# EAGLE board CT_schematic (EAGLE 7.6.0)

Size 100 x 80 mm. Coordinates in mm from the lower left corner, seen from the top.
Outline: 0,0 100,0 100,80 0,80 0,0
Copper layers (1*16): Top 0.035mm / dielectric 1.5mm / Bottom 0.035mm
Design rules "default": minimum track width 10mil, minimum drill 24mil, track to track 8mil, track to pad 8mil, pad to pad 8mil, via to via 8mil, smd to smd 8mil, copper to edge 40mil, drill to drill 8mil, minimum pad ring 10mil, minimum via ring 8mil, stop-mask expansion 4mil, vias tented up to drill 0mil, thermal gap 10mil

## Footprints (pad centres in the part's own frame; a part is rotated, then mirrored left to right if it is on the bottom)
C0603 = smd 0.8 x 0.8: 1 -0.762,0; 2 0.762,0
C0402 = smd 0.5 x 0.5: 1 -0.508,0; 2 0.508,0
C0805 = smd 1.2 x 1.3: 1 -1.016,0; 2 1.016,0
C1210 = smd 1.2 x 2.5: 1 -1.524,0; 2 1.524,0
2220 = smd 1.85 x 5.5: 1 -2.55,0; 2 2.55,0
EXV-9H = smd 3.505 x 1.676: 1 -2.857,0; 2 2.857,0
L0603 = smd 0.8 x 0.8: 1 -0.762,0; 2 0.762,0
DR1040 = smd 1.6 x 3.2: 1 -4.458,0; 2 4.458,0
IND_PM3316 = smd 2.921 x 2.794: 1 -5.144,0; 2 5.144,0
L1210 = smd 1.2 x 2.5: 1 -1.524,0; 2 1.524,0
PJ-037B_PACKAGE = drill 3.7 square: 1 12,0 | drill 3.2 square: 2 6,0
R0603 = smd 0.8 x 0.8: 1 -0.762,0; 2 0.762,0
LQFP208 = smd 0.3 x 1.2: 1 -12.75,-14.4; 2 -12.25,-14.4; 3 -11.75,-14.4; 4 -11.25,-14.4; 5 -10.75,-14.4; 6 -10.25,-14.4; 7 -9.75,-14.4; 8 -9.25,-14.4; 9 -8.75,-14.4; 10 -8.25,-14.4; 11 -7.75,-14.4; 12 -7.25,-14.4; 13 -6.75,-14.4; 14 -6.25,-14.4; 15 -5.75,-14.4; 16 -5.25,-14.4; 17 -4.75,-14.4; 18 -4.25,-14.4; 19 -3.75,-14.4; 20 -3.25,-14.4; 21 -2.75,-14.4; 22 -2.25,-14.4; 23 -1.75,-14.4; 24 -1.25,-14.4; 25 -0.75,-14.4; 26 -0.25,-14.4; 27 0.25,-14.4; 28 0.75,-14.4; 29 1.25,-14.4; 30 1.75,-14.4; 31 2.25,-14.4; 32 2.75,-14.4; 33 3.25,-14.4; 34 3.75,-14.4; 35 4.25,-14.4; 36 4.75,-14.4; 37 5.25,-14.4; 38 5.75,-14.4; 39 6.25,-14.4; 40 6.75,-14.4; 41 7.25,-14.4; 42 7.75,-14.4; 43 8.25,-14.4; 44 8.75,-14.4; 45 9.25,-14.4; 46 9.75,-14.4; 47 10.25,-14.4; 48 10.75,-14.4; 49 11.25,-14.4; 50 11.75,-14.4; 51 12.25,-14.4; 52 12.75,-14.4; 105 12.75,14.4; 106 12.25,14.4; 107 11.75,14.4; 108 11.25,14.4; 109 10.75,14.4; 110 10.25,14.4; 111 9.75,14.4; 112 9.25,14.4; 113 8.75,14.4; 114 8.25,14.4; 115 7.75,14.4; 116 7.25,14.4; 117 6.75,14.4; 118 6.25,14.4; 119 5.75,14.4; 120 5.25,14.4; 121 4.75,14.4; 122 4.25,14.4; 123 3.75,14.4; 124 3.25,14.4; 125 2.75,14.4; 126 2.25,14.4; 127 1.75,14.4; 128 1.25,14.4; 129 0.75,14.4; 130 0.25,14.4; 131 -0.25,14.4; 132 -0.75,14.4; 133 -1.25,14.4; 134 -1.75,14.4; 135 -2.25,14.4; 136 -2.75,14.4; 137 -3.25,14.4; 138 -3.75,14.4; 139 -4.25,14.4; 140 -4.75,14.4; 141 -5.25,14.4; 142 -5.75,14.4; 143 -6.25,14.4; 144 -6.75,14.4; 145 -7.25,14.4; 146 -7.75,14.4; 147 -8.25,14.4; 148 -8.75,14.4; 149 -9.25,14.4; 150 -9.75,14.4; 151 -10.25,14.4; 152 -10.75,14.4; 153 -11.25,14.4; 154 -11.75,14.4; 155 -12.25,14.4; 156 -12.75,14.4 | smd 1.2 x 0.3: 53 14.4,-12.75; 54 14.4,-12.25; 55 14.4,-11.75; 56 14.4,-11.25; 57 14.4,-10.75; 58 14.4,-10.25; 59 14.4,-9.75; 60 14.4,-9.25; 61 14.4,-8.75; 62 14.4,-8.25; 63 14.4,-7.75; 64 14.4,-7.25; 65 14.4,-6.75; 66 14.4,-6.25; 67 14.4,-5.75; 68 14.4,-5.25; 69 14.4,-4.75; 70 14.4,-4.25; 71 14.4,-3.75; 72 14.4,-3.25; 73 14.4,-2.75; 74 14.4,-2.25; 75 14.4,-1.75; 76 14.4,-1.25; 77 14.4,-0.75; 78 14.4,-0.25; 79 14.4,0.25; 80 14.4,0.75; 81 14.4,1.25; 82 14.4,1.75; 83 14.4,2.25; 84 14.4,2.75; 85 14.4,3.25; 86 14.4,3.75; 87 14.4,4.25; 88 14.4,4.75; 89 14.4,5.25; 90 14.4,5.75; 91 14.4,6.25; 92 14.4,6.75; 93 14.4,7.25; 94 14.4,7.75; 95 14.4,8.25; 96 14.4,8.75; 97 14.4,9.25; 98 14.4,9.75; 99 14.4,10.25; 100 14.4,10.75; 101 14.4,11.25; 102 14.4,11.75; 103 14.4,12.25; 104 14.4,12.75; 157 -14.4,12.75; 158 -14.4,12.25; 159 -14.4,11.75; 160 -14.4,11.25; 161 -14.4,10.75; 162 -14.4,10.25; 163 -14.4,9.75; 164 -14.4,9.25; 165 -14.4,8.75; 166 -14.4,8.25; 167 -14.4,7.75; 168 -14.4,7.25; 169 -14.4,6.75; 170 -14.4,6.25; 171 -14.4,5.75; 172 -14.4,5.25; 173 -14.4,4.75; 174 -14.4,4.25; 175 -14.4,3.75; 176 -14.4,3.25; 177 -14.4,2.75; 178 -14.4,2.25; 179 -14.4,1.75; 180 -14.4,1.25; 181 -14.4,0.75; 182 -14.4,0.25; 183 -14.4,-0.25; 184 -14.4,-0.75; 185 -14.4,-1.25; 186 -14.4,-1.75; 187 -14.4,-2.25; 188 -14.4,-2.75; 189 -14.4,-3.25; 190 -14.4,-3.75; 191 -14.4,-4.25; 192 -14.4,-4.75; 193 -14.4,-5.25; 194 -14.4,-5.75; 195 -14.4,-6.25; 196 -14.4,-6.75; 197 -14.4,-7.25; 198 -14.4,-7.75; 199 -14.4,-8.25; 200 -14.4,-8.75; 201 -14.4,-9.25; 202 -14.4,-9.75; 203 -14.4,-10.25; 204 -14.4,-10.75; 205 -14.4,-11.25; 206 -14.4,-11.75; 207 -14.4,-12.25; 208 -14.4,-12.75
TQFP64_10X10MC = smd 1.473 x 0.279: 1 -5.613,3.75; 2 -5.613,3.25; 3 -5.613,2.75; 4 -5.613,2.25; 5 -5.613,1.75; 6 -5.613,1.25; 7 -5.613,0.75; 8 -5.613,0.25; 9 -5.613,-0.25; 10 -5.613,-0.75; 11 -5.613,-1.25; 12 -5.613,-1.75; 13 -5.613,-2.25; 14 -5.613,-2.75; 15 -5.613,-3.25; 16 -5.613,-3.75; 33 5.613,-3.75; 34 5.613,-3.25; 35 5.613,-2.75; 36 5.613,-2.25; 37 5.613,-1.75; 38 5.613,-1.25; 39 5.613,-0.75; 40 5.613,-0.25; 41 5.613,0.25; 42 5.613,0.75; 43 5.613,1.25; 44 5.613,1.75; 45 5.613,2.25; 46 5.613,2.75; 47 5.613,3.25; 48 5.613,3.75 | smd 0.279 x 1.473: 17 -3.75,-5.613; 18 -3.25,-5.613; 19 -2.75,-5.613; 20 -2.25,-5.613; 21 -1.75,-5.613; 22 -1.25,-5.613; 23 -0.75,-5.613; 24 -0.25,-5.613; 25 0.25,-5.613; 26 0.75,-5.613; 27 1.25,-5.613; 28 1.75,-5.613; 29 2.25,-5.613; 30 2.75,-5.613; 31 3.25,-5.613; 32 3.75,-5.613; 49 3.75,5.613; 50 3.25,5.613; 51 2.75,5.613; 52 2.25,5.613; 53 1.75,5.613; 54 1.25,5.613; 55 0.75,5.613; 56 0.25,5.613; 57 -0.25,5.613; 58 -0.75,5.613; 59 -1.25,5.613; 60 -1.75,5.613; 61 -2.25,5.613; 62 -2.75,5.613; 63 -3.25,5.613; 64 -3.75,5.613
7498011122R = smd 0.71 x 2.29: 1 -3.545,-3.18; 2 -2.525,-3.18; 3 -1.505,-3.18; 4 -0.485,-3.18; 5 0.535,-3.18; 6 1.555,-3.18; 8 3.595,-3.18; 9 5.635,-3.18; 10 6.655,-3.18; 11 -6.605,-3.18; 12 -5.585,-3.18 | smd 1.4 x 2.54: 13 -8.51,10.2; 14 8.51,10.2 | hole 1.4: -3.5,0; 3.5,0
SSOP-28 = smd 1.5 x 0.4: 1 -3.625,4.225; 2 -3.625,3.575; 3 -3.625,2.925; 4 -3.625,2.275; 5 -3.625,1.625; 6 -3.625,0.975; 7 -3.625,0.325; 8 -3.625,-0.325; 9 -3.625,-0.975; 10 -3.625,-1.625; 11 -3.625,-2.275; 12 -3.625,-2.925; 13 -3.625,-3.575; 14 -3.625,-4.225; 15 3.625,-4.225; 16 3.625,-3.575; 17 3.625,-2.925; 18 3.625,-2.275; 19 3.625,-1.625; 20 3.625,-0.975; 21 3.625,-0.325; 22 3.625,0.325; 23 3.625,0.975; 24 3.625,1.625; 25 3.625,2.275; 26 3.625,2.925; 27 3.625,3.575; 28 3.625,4.225
FCI_10118193-0001LF = smd 0.4 x 1.35: 1 -1.3,2.675; 2 -0.65,2.675; 3 0,2.675; 4 0.65,2.675; 5 1.3,2.675 | smd 1.6 x 1.4: 6 -3.2,2.45; 7 3.2,2.45 | smd 1.9 x 1.9: 8 -1.2,0; 9 1.2,0 | hole 0.5: -3.3,0; 3.3,0
LH430WV2-SD01 = smd 0.23 x 0.7: 1 0,0; 2 -0.4,0; 3 -0.8,0; 4 -1.2,0; 5 -1.6,0; 6 -2,0; 7 -2.4,0; 8 -2.8,0; 9 -3.2,0; 10 -3.6,0; 11 -4,0; 12 -4.4,0; 13 -4.8,0; 14 -5.2,0; 15 -5.6,0; 16 -5.6,-2.15; 17 -5.2,-2.15; 18 -4.8,-2.15; 19 -4.4,-2.15; 20 -4,-2.15; 21 -3.6,-2.15; 22 -3.2,-2.15; 23 -2.8,-2.15; 24 -2.4,-2.15; 25 -2,-2.15; 26 -1.6,-2.15; 27 -1.2,-2.15; 28 -0.8,-2.15; 29 -0.4,-2.15; 30 0,-2.15
TDFN-8/6MM = smd 0.3 x 0.75: 1 0,0; 2 0.5,0; 3 1,0; 4 1.5,0; 5 1.5,3; 6 1,3; 7 0.5,3; 8 0,3
QFN-32 = smd 0.6 x 0.3: 1 -2.3,1.75; 2 -2.3,1.25; 3 -2.3,0.75; 4 -2.3,0.25; 5 -2.3,-0.25; 6 -2.3,-0.75; 7 -2.3,-1.25; 8 -2.3,-1.75; 17 2.3,-1.75; 18 2.3,-1.25; 19 2.3,-0.75; 20 2.3,-0.25; 21 2.3,0.25; 22 2.3,0.75; 23 2.3,1.25; 24 2.3,1.75 | smd 0.3 x 0.6: 9 -1.75,-2.3; 10 -1.25,-2.3; 11 -0.75,-2.3; 12 -0.25,-2.3; 13 0.25,-2.3; 14 0.75,-2.3; 15 1.25,-2.3; 16 1.75,-2.3; 25 1.75,2.3; 26 1.25,2.3; 27 0.75,2.3; 28 0.25,2.3; 29 -0.25,2.3; 30 -0.75,2.3; 31 -1.25,2.3; 32 -1.75,2.3 | smd 3.2 x 3.2: EXP 0,0
SJ-43515TS-SMT-TR = smd 2.2 x 3: 1 0.6,-7.4; 4 3.4,-7.4 | smd 3 x 3: 2 12.8,-7.4; 5 17,-3 | smd 2 x 3: 3 5.3,0; 6 2.5,0 | drill 1.8: P$7 4.5,-3.69; P$8 11.54,-3.69
WM-64PC = drill 0.6 pad 1: 1 -1,0.95; 2 -1,-0.95
QFN-28 = smd 0.813 x 0.305: 1 -2.451,1.5; 2 -2.451,1; 3 -2.451,0.5; 4 -2.451,0; 5 -2.451,-0.5; 6 -2.451,-1; 7 -2.451,-1.5; 15 2.451,-1.5; 16 2.451,-1; 17 2.451,-0.5; 18 2.451,0; 19 2.451,0.5; 20 2.451,1; 21 2.451,1.5 | smd 0.305 x 0.813: 8 -1.5,-2.451; 9 -1,-2.451; 10 -0.5,-2.451; 11 0,-2.451; 12 0.5,-2.451; 13 1,-2.451; 14 1.5,-2.451; 22 1.5,2.451; 23 1,2.451; 24 0.5,2.451; 25 0,2.451; 26 -0.5,2.451; 27 -1,2.451; 28 -1.5,2.451 | smd 3.607 x 3.607: 29 0,0
ABS07-32.768KHZ-7-T = smd 1.1 x 2.4: 1 -2.5,0; 2 0,0
ABLS-25.000MHZ-B2F-T = smd 5.6 x 2.8: 1 -3.81,0; 2 5.69,0
ABLS-12.000MHZ-B4-T = smd 5.6 x 2.8: 1 0,0; 2 9.5,0
ABLS-12.288MHZ-B4-T = smd 5.6 x 2.8: 1 -3.81,0; 2 5.69,0
ASFL1 = smd 1.7 x 1.5: 1 -1.27,-1.1; 2 1.27,-1.1; 3 1.27,1.1; 4 -1.27,1.1
SOIC-8_EP = smd 1.6 x 0.533: 1 -2.921,1.905; 2 -2.921,0.635; 3 -2.921,-0.635; 4 -2.921,-1.905; 5 2.921,-1.905; 6 2.921,-0.635; 7 2.921,0.635; 8 2.921,1.905 | smd 2.54 x 3.302: EPAD 0,0 | drill 0.406 pad 0.406: P$1 -0.508,0.635; P$2 0.381,0.635; P$3 -0.508,-0.635; P$4 0.381,-0.635
TSOT-23-5 = smd 1.3 x 0.62: 1 -1.31,0.95; 2 -1.31,0; 3 -1.31,-0.95; 4 1.31,-0.95; 5 1.31,0.95
QFN-16_EP = smd 0.805 x 0.3: 1 -1.452,0.75; 2 -1.452,0.25; 3 -1.452,-0.25; 4 -1.452,-0.75; 9 1.452,-0.75; 10 1.452,-0.25; 11 1.452,0.25; 12 1.452,0.75 | smd 0.3 x 0.805: 5 -0.75,-1.452; 6 -0.25,-1.452; 7 0.25,-1.452; 8 0.75,-1.452; 13 0.75,1.452; 14 0.25,1.452; 15 -0.25,1.452; 16 -0.75,1.452 | smd 1.55 x 1.55: 17 0,0
DFN-8_DDB = smd 0.805 x 0.3: 1 -0.952,0.75; 2 -0.952,0.25; 3 -0.952,-0.25; 4 -0.952,-0.75; 5 0.952,-0.75; 6 0.952,-0.25; 7 0.952,0.25; 8 0.952,0.75 | smd 0.61 x 2.2: 9 0,0
SON-6 = smd 0.55 x 0.3: 1 -0.355,0.5 | smd 0.52 x 0.3: 2 -0.37,0; 3 -0.37,-0.5; 4 0.37,-0.5; 5 0.37,0; 6 0.37,0.5
SW_4-1437565-2 = smd 1.4 x 2.1: 1 -2.23,4.55; 2 -2.23,-4.55; 3 2.23,4.55; 4 2.23,-4.55
LGM67K-G1J2-24-Z = smd 0.8 x 1.4: A -2,0; C 0,0
NC7SZ125M5X = smd 1.3 x 0.7: 1 -1.3,0.95; 2 -1.3,0; 3 -1.3,-0.95; 4 1.3,-0.95; 5 1.3,0.95

## Placement (x,y rotation side)
C1  1e-06  [C0603]  -105.41,99.06 0 top  (outside the outline)
C2  1e-07  [C0603]  -109.22,99.06 0 top  (outside the outline)
C3  1e-07  [C0603]  -15.24,104.14 0 top  (outside the outline)
C4  1e-07  [C0603]  -19.05,104.14 0 top  (outside the outline)
C5  1e-07  [C0603]  -22.86,104.14 0 top  (outside the outline)
C6  1e-07  [C0603]  -26.67,104.14 0 top  (outside the outline)
C7  1e-07  [C0603]  -30.48,104.14 0 top  (outside the outline)
C8  1e-07  [C0603]  -34.29,104.14 0 top  (outside the outline)
C9  1e-07  [C0603]  -38.1,104.14 0 top  (outside the outline)
C10  1e-07  [C0603]  -41.91,104.14 0 top  (outside the outline)
C11  1e-07  [C0603]  -45.72,104.14 0 top  (outside the outline)
C12  1e-07  [C0603]  -49.53,104.14 0 top  (outside the outline)
C13  1e-07  [C0603]  -53.34,104.14 0 top  (outside the outline)
C14  1e-07  [C0603]  -57.15,104.14 0 top  (outside the outline)
C15  1e-07  [C0603]  -60.96,104.14 0 top  (outside the outline)
C16  1e-07  [C0603]  -64.77,104.14 0 top  (outside the outline)
C17  1e-07  [C0603]  -68.58,104.14 0 top  (outside the outline)
C18  1e-07  [C0603]  -72.39,104.14 0 top  (outside the outline)
C19  1e-07  [C0603]  -76.2,104.14 0 top  (outside the outline)
C20  4.7e-06  [C0603]  -74.93,99.06 0 top  (outside the outline)
C21  2.2e-06  [C0603]  -78.74,99.06 0 top  (outside the outline)
C22  2.2e-06  [C0603]  -82.55,99.06 0 top  (outside the outline)
C23  1e-08  [C0603]  -80.01,104.14 0 top  (outside the outline)
C24  1e-06  [C0603]  -83.82,104.14 0 top  (outside the outline)
C25  1e-07  [C0603]  -87.63,104.14 0 top  (outside the outline)
C26  2.2e-06  [C0603]  -86.36,99.06 0 top  (outside the outline)
C27  1e-11  [C0402]  -46.99,114.3 0 top  (outside the outline)
C28  1e-11  [C0402]  -50.8,114.3 0 top  (outside the outline)
C29  1e-11  [C0402]  -54.61,114.3 0 top  (outside the outline)
C30  1e-11  [C0402]  -58.42,114.3 0 top  (outside the outline)
C31  1.8e-08  [C0402]  -31.75,114.3 0 top  (outside the outline)
C32  2.2e-06  [C0603]  -90.17,99.06 0 top  (outside the outline)
C33  1e-07  [C0402]  -62.23,114.3 0 top  (outside the outline)
C34  1e-08  [C0402]  -66.04,114.3 0 top  (outside the outline)
C35  2.2e-06  [C0603]  -93.98,99.06 0 top  (outside the outline)
C36  1e-07  [C0402]  -69.85,114.3 0 top  (outside the outline)
C37  1e-08  [C0402]  -73.66,114.3 0 top  (outside the outline)
C38  1e-07  [C0402]  -77.47,114.3 0 top  (outside the outline)
C39  1e-07  [C0402]  -81.28,114.3 0 top  (outside the outline)
C40  1e-05  [C0805]  -59.69,87.63 0 top  (outside the outline)
C41  1e-07  [C0402]  -85.09,114.3 0 top  (outside the outline)
C42  1e-07  [C0402]  -88.9,114.3 0 top  (outside the outline)
C43  1e-07  [C0402]  -92.71,114.3 0 top  (outside the outline)
C44  4.7e-06  [C0805]  -64.77,87.63 0 top  (outside the outline)
C45  1e-07  [C0402]  -96.52,114.3 0 top  (outside the outline)
C46  1e-07  [C0402]  -100.33,114.3 0 top  (outside the outline)
C47  1e-07  [C0402]  -104.14,114.3 0 top  (outside the outline)
C48  1e-07  [C0402]  -107.95,114.3 0 top  (outside the outline)
C49  1e-07  [C0402]  -15.24,119.38 0 top  (outside the outline)
C50  1e-07  [C0402]  -19.05,119.38 0 top  (outside the outline)
C51  1e-07  [C0402]  -22.86,119.38 0 top  (outside the outline)
C52  1e-08  [C0402]  -26.67,119.38 0 top  (outside the outline)
C53  1e-06  [C0603]  -91.44,104.14 0 top  (outside the outline)
C54  1e-06  [C0603]  -95.25,104.14 0 top  (outside the outline)
C55  1e-06  [C0603]  -99.06,104.14 0 top  (outside the outline)
C56  1e-06  [C0603]  -102.87,104.14 0 top  (outside the outline)
C57  1e-06  [C0603]  -106.68,104.14 0 top  (outside the outline)
C58  1e-06  [C0603]  -110.49,104.14 0 top  (outside the outline)
C59  1e-06  [C0603]  -15.24,109.22 0 top  (outside the outline)
C60  1e-07  [C0402]  -30.48,119.38 0 top  (outside the outline)
C61  1e-07  [C0402]  -34.29,119.38 0 top  (outside the outline)
C62  1e-07  [C0402]  -38.1,119.38 0 top  (outside the outline)
C63  1e-07  [C0402]  -41.91,119.38 0 top  (outside the outline)
C64  1e-06  [C0603]  -19.05,109.22 0 top  (outside the outline)
C65  2.2e-05  [C1210]  -86.36,81.28 0 top  (outside the outline)
C66  2.2e-05  [C1210]  -92.71,81.28 0 top  (outside the outline)
C67  1e-09  [C0402]  -45.72,119.38 0 top  (outside the outline)
C68  1e-09  [C0402]  -49.53,119.38 0 top  (outside the outline)
C69  1e-07  [C0402]  -53.34,119.38 0 top  (outside the outline)
C70  1e-07  [C0402]  -57.15,119.38 0 top  (outside the outline)
C71  1e-07  [C0402]  -60.96,119.38 0 top  (outside the outline)
C72  1e-07  [C0402]  -64.77,119.38 0 top  (outside the outline)
C73  1e-07  [C0402]  -68.58,119.38 0 top  (outside the outline)
C74  1e-05  [C0805]  -69.85,87.63 0 top  (outside the outline)
C75  1e-05  [C0805]  -74.93,87.63 0 top  (outside the outline)
C76  1e-05  [C0805]  -80.01,87.63 0 top  (outside the outline)
C77  1e-05  [C0805]  -85.09,87.63 0 top  (outside the outline)
C78  1e-05  [C0805]  -90.17,87.63 0 top  (outside the outline)
C79  2.2e-11  [C0402]  -35.56,114.3 0 top  (outside the outline)
C80  2.2e-11  [C0402]  -39.37,114.3 0 top  (outside the outline)
C81  1e-08  [C0402]  -72.39,119.38 0 top  (outside the outline)
C82  1e-05  [C1210]  -99.06,81.28 0 top  (outside the outline)
C83  1e-05  [C1210]  -105.41,81.28 0 top  (outside the outline)
C84  1e-05  [C1210]  -16.51,88.9 0 top  (outside the outline)
C85  1e-05  [C1210]  -22.86,88.9 0 top  (outside the outline)
C86  1e-05  [C0805]  -95.25,87.63 0 top  (outside the outline)
C87  1e-05  [C0805]  -100.33,87.63 0 top  (outside the outline)
C88  1e-05  [C0805]  -105.41,87.63 0 top  (outside the outline)
C89  1e-06  [C0603]  -22.86,109.22 0 top  (outside the outline)
C90  1e-07  [C0402]  -76.2,119.38 0 top  (outside the outline)
C91  6.8e-05  [2220]  -81.28,63.5 0 top  (outside the outline)
C92  1e-05  [C1210]  -29.21,88.9 0 top  (outside the outline)
C93  2.2e-06  [C0603]  -97.79,99.06 0 top  (outside the outline)
C94  2.2e-07  [C0603]  -101.6,99.06 0 top  (outside the outline)
C95  1e-07  [C0402]  -80.01,119.38 0 top  (outside the outline)
C96  0.0001  [EXV-9H]  -29.21,73.66 0 top  (outside the outline)
C97  0.0001  [EXV-9H]  -40.64,73.66 0 top  (outside the outline)
C98  1e-08  [C0402]  -83.82,119.38 0 top  (outside the outline)
C99  1e-08  [C0402]  -87.63,119.38 0 top  (outside the outline)
C100  1e-08  [C0402]  -43.18,114.3 0 top  (outside the outline)
F1  240.0  [L0603]  -26.67,109.22 0 top  (outside the outline)
F2  510.0  [L0603]  -30.48,109.22 0 top  (outside the outline)
I1  7e-06  [DR1040]  -19.05,63.5 0 top  (outside the outline)
I2  1.5e-06  [IND_PM3316]  -41.91,63.5 0 top  (outside the outline)
I3  1e-05  [L1210]  -35.56,88.9 0 top  (outside the outline)
J1  PJ-037B  [PJ-037B_PACKAGE]  -83.82,50.8 0 top  (outside the outline)
R2  1000.0  [R0603]  -34.29,109.22 0 top  (outside the outline)
R4  4700.0  [R0603]  -38.1,109.22 0 top  (outside the outline)
R5  4700.0  [R0603]  -41.91,109.22 0 top  (outside the outline)
R6  4700.0  [R0603]  -45.72,109.22 0 top  (outside the outline)
R7  2200.0  [R0603]  -49.53,109.22 0 top  (outside the outline)
R8  2200.0  [R0603]  -53.34,109.22 0 top  (outside the outline)
R9  2200.0  [R0603]  -57.15,109.22 0 top  (outside the outline)
R10  2200.0  [R0603]  -60.96,109.22 0 top  (outside the outline)
R11  2200.0  [R0603]  -64.77,109.22 0 top  (outside the outline)
R12  10000.0  [R0603]  -58.42,93.98 0 top  (outside the outline)
R13  10000.0  [R0603]  -63.5,93.98 0 top  (outside the outline)
R14  10000.0  [R0603]  -68.58,93.98 0 top  (outside the outline)
R15  0.1  [R0603]  -68.58,109.22 0 top  (outside the outline)
R16  0.1  [R0603]  -72.39,109.22 0 top  (outside the outline)
R17  200.0  [R0603]  -76.2,109.22 0 top  (outside the outline)
R18  200.0  [R0603]  -80.01,109.22 0 top  (outside the outline)
R19  10000.0  [R0603]  -73.66,93.98 0 top  (outside the outline)
R20  10000.0  [R0603]  -78.74,93.98 0 top  (outside the outline)
R21  10000.0  [R0603]  -83.82,93.98 0 top  (outside the outline)
R22  1270.0  [R0603]  -83.82,109.22 0 top  (outside the outline)
R23  10000.0  [R0603]  -88.9,93.98 0 top  (outside the outline)
R24  10000.0  [R0603]  -93.98,93.98 0 top  (outside the outline)
R25  10000.0  [R0603]  -99.06,93.98 0 top  (outside the outline)
R26  10000.0  [R0603]  -104.14,93.98 0 top  (outside the outline)
R27  10000.0  [R0603]  -109.22,93.98 0 top  (outside the outline)
R28  10000.0  [R0603]  -15.24,99.06 0 top  (outside the outline)
R29  10000.0  [R0603]  -20.32,99.06 0 top  (outside the outline)
R30  4700.0  [R0603]  -87.63,109.22 0 top  (outside the outline)
R31  10000.0  [R0603]  -25.4,99.06 0 top  (outside the outline)
R32  10000.0  [R0603]  -30.48,99.06 0 top  (outside the outline)
R33  10000.0  [R0603]  -35.56,99.06 0 top  (outside the outline)
R34  1270.0  [R0603]  -91.44,109.22 0 top  (outside the outline)
R35  1270.0  [R0603]  -95.25,109.22 0 top  (outside the outline)
R36  47000.0  [R0603]  -40.64,99.06 0 top  (outside the outline)
R37  47000.0  [R0603]  -45.72,99.06 0 top  (outside the outline)
R38  47000.0  [R0603]  -50.8,99.06 0 top  (outside the outline)
R39  680.0  [R0603]  -99.06,109.22 0 top  (outside the outline)
R40  910.0  [R0603]  -102.87,109.22 0 top  (outside the outline)
R41  2200.0  [R0603]  -106.68,109.22 0 top  (outside the outline)
R42  270000.0  [R0603]  -33.02,93.98 0 top  (outside the outline)
R43  1000000.0  [R0603]  -22.86,93.98 0 top  (outside the outline)
R44  20000.0  [R0603]  -55.88,99.06 0 top  (outside the outline)
R45  91000.0  [R0603]  -60.96,99.06 0 top  (outside the outline)
R46  300000.0  [R0603]  -38.1,93.98 0 top  (outside the outline)
R47  100000.0  [R0603]  -43.18,93.98 0 top  (outside the outline)
R48  1600000.0  [R0603]  -27.94,93.98 0 top  (outside the outline)
R49  10000.0  [R0603]  -66.04,99.06 0 top  (outside the outline)
R50  10000.0  [R0603]  -71.12,99.06 0 top  (outside the outline)
R51  9100.0  [R0603]  -110.49,109.22 0 top  (outside the outline)
R52  680000.0  [R0603]  -48.26,93.98 0 top  (outside the outline)
R53  120000.0  [R0603]  -53.34,93.98 0 top  (outside the outline)
U1  STM32F469BET6  [LQFP208]  -27.94,15.24 0 top  (outside the outline)
U2  BCM5221KPT  [TQFP64_10X10MC]  -83.82,7.62 0 top  (outside the outline)
U3  7498011122R  [7498011122R]  -53.34,7.62 0 top  (outside the outline)
U4  FT232RL-REEL  [SSOP-28]  -71.12,7.62 0 top  (outside the outline)
U5  10118193-0001LF  [FCI_10118193-0001LF]  -19.05,72.39 0 top  (outside the outline)
U6  LH430WV2-SD01  [LH430WV2-SD01]  -15.24,115.57 0 top  (outside the outline)
U7  24AA04-I/MC  [TDFN-8/6MM]  -73.66,62.23 0 top  (outside the outline)
U8  SGTL5000XNAA3  [QFN-32]  -59.69,63.5 0 top  (outside the outline)
U9  SJ-43515TS-SMT-TR  [SJ-43515TS-SMT-TR]  -39.37,39.37 0 top  (outside the outline)
U10  SJ-43515TS-SMT-TR  [SJ-43515TS-SMT-TR]  -67.31,39.37 0 top  (outside the outline)
U11  SJ-43515TS-SMT-TR  [SJ-43515TS-SMT-TR]  -95.25,39.37 0 top  (outside the outline)
U12  WM-64PCT  [WM-64PC]  -31.75,63.5 0 top  (outside the outline)
U13  WM8731CLSEFL  [QFN-28]  -78.74,81.28 0 top  (outside the outline)
U14  SJ-43515TS-SMT-TR  [SJ-43515TS-SMT-TR]  -39.37,53.34 0 top  (outside the outline)
U15  SJ-43515TS-SMT-TR  [SJ-43515TS-SMT-TR]  -67.31,53.34 0 top  (outside the outline)
U16  ABS07-32.768KHZ-7-T  [ABS07-32.768KHZ-7-T]  -48.26,81.28 0 top  (outside the outline)
U17  ABLS-25.000MHZ-B2F-T  [ABLS-25.000MHZ-B2F-T]  -59.69,73.66 0 top  (outside the outline)
U18  ABLS-25.000MHZ-B2F-T  [ABLS-25.000MHZ-B2F-T]  -80.01,73.66 0 top  (outside the outline)
U19  ABLS-12.000MHZ-B4-T  [ABLS-12.000MHZ-B4-T]  -104.14,73.66 0 top  (outside the outline)
U20  ABLS-12.288MHZ-B4-T  [ABLS-12.288MHZ-B4-T]  -25.4,81.28 0 top  (outside the outline)
U21  ASFL-24.57MHZ-NCS  [ASFL1]  -100.33,63.5 0 top  (outside the outline)
U22  MIC5234YME  [SOIC-8_EP]  -57.15,81.28 0 top  (outside the outline)
U23  ltc3406es5  [TSOT-23-5]  -15.24,93.98 0 top  (outside the outline)
U24  LTC3601EUD#PBF  [QFN-16_EP]  -25.4,114.3 0 top  (outside the outline)
U25  LT3494AEDDB#TRMPBF  [DFN-8_DDB]  -91.44,119.38 0 top  (outside the outline)
U26  TPS3895ADRYR  [SON-6]  -96.52,118.11 0 top  (outside the outline)
U27  4-1437565-2  [SW_4-1437565-2]  -100.33,50.8 0 top  (outside the outline)
U28  Q65110A2395  [LGM67K-G1J2-24-Z]  -66.04,81.28 0 top  (outside the outline)
U29  nc7sz125m5x  [NC7SZ125M5X]  -40.64,87.63 0 top  (outside the outline)
U30  nc7sz125m5x  [NC7SZ125M5X]  -46.99,87.63 0 top  (outside the outline)
U31  nc7sz125m5x  [NC7SZ125M5X]  -53.34,87.63 0 top  (outside the outline)

## Library data of the parts
C1-C100 F1 F2 I1-I3 J1 R2 R4-R53 U1-U31 = circuit_tree

## Nets
CLK_CRYSTAL_U1_9: C27.1 U1.9 U16.1
CLK_CRYSTAL_U1_10: C28.1 U1.10 U16.2
CLK_CRYSTAL_U1_32: C29.1 U1.32 U17.1
CLK_CRYSTAL_U1_33: C30.1 U1.33 U17.2
CLK_CRYSTAL_U2_5: U2.5 U18.2
CLK_CRYSTAL_U2_6: U2.6 U18.1
CLK_CRYSTAL_U4_27: U4.27 U19.1
CLK_CRYSTAL_U4_28: U4.28 U19.2
CLK_CRYSTAL_U13_1: C79.1 U13.1 U20.1
CLK_CRYSTAL_U13_2: C80.1 U13.2 U20.2
CLK_U8_21: U8.21 U21.3
GND: C1.2 C2.2 C3.2 C4.2 C5.2 C6.2 C7.2 C8.2 C9.2 C10.2 C11.2 C12.2 C13.2 C14.2 C15.2 C16.2 C17.2 C18.2 C19.2 C20.2 C21.2 C22.2 C23.2 C24.2 C25.2 C26.2 C27.2 C28.2 C29.2 C30.2 C31.2 C32.2 C33.2 C34.2 C35.2 C36.2 C37.2 C38.2 C39.2 C40.2 C41.2 C42.2 C43.2 C44.2 C45.2 C46.2 C47.2 C48.2 C49.2 C50.2 C51.2 C52.2 C60.2 C61.2 C62.2 C63.2 C64.2 C68.2 C69.2 C70.2 C71.2 C72.2 C73.2 C74.2 C75.2 C76.2 C77.2 C78.2 C79.2 C80.2 C81.2 C82.2 C83.2 C84.2 C85.2 C86.2 C87.1 C87.2 C88.2 C89.2 C91.1 C91.2 C92.2 C93.2 C94.2 C95.2 C96.2 C97.2 C98.2 C99.2 C100.2 J1.2 R2.2 R14.2 R15.2 R16.2 R19.2 R21.2 R22.2 R23.2 R25.2 R26.2 R27.2 R28.2 R32.2 R33.2 R35.2 R36.2 R37.2 R38.2 R41.2 R42.2 R44.2 R46.2 R51.2 R53.2 U1.14 U1.25 U1.40 U1.51 U1.60 U1.72 U1.82 U1.93 U1.114 U1.122 U1.128 U1.136 U1.149 U1.170 U1.184 U1.202 U2.7 U2.24 U2.29 U2.32 U2.40 U2.45 U2.54 U2.63 U3.10 U3.12 U4.7 U4.18 U4.21 U4.25 U4.26 U5.5 U5.6 U5.7 U5.8 U5.9 U6.1 U6.6 U6.9 U6.12 U6.15 U6.17 U6.18 U6.19 U6.24 U6.27 U7.4 U7.7 U8.1 U8.3 U8.7 U8.EXP U10.1 U11.1 U12.2 U13.4 U13.15 U13.19 U13.25 U13.26 U13.29 U14.1 U15.1 U21.2 U22.7 U22.EPAD U23.2 U24.1 U24.9 U24.17 U25.2 U25.9 U26.2 U28.C U29.1 U29.3 U30.1 U30.3 U31.1 U31.3
NET_U1_34: R6.1 U1.34 U31.4
NET_U1_36: R9.1 U1.36 U2.42
NET_U1_42: C23.1 C24.1 F1.1 U1.41 U1.42
NET_U1_45: R10.1 U1.45 U2.41
NET_U1_63: R14.1 U1.63
NET_U1_92: C21.1 U1.92
NET_U1_125: C26.1 U1.119 U1.125
NET_U1_148: C22.1 U1.148
NET_U1_195: R7.1 U1.195 U7.6
NET_U1_196: R8.1 U1.196 U7.5
NET_U1_197: R13.1 U1.197
NET_U1_203: R12.1 U1.203
NET_U1_207: U28.A
NET_U1_208: U27.3 U27.4
NET_U2_2: C35.1 C36.1 C37.1 U2.2 U2.55
NET_U2_9: R5.1 U2.9 U30.4
NET_U2_10: R23.1 U2.10
NET_U2_11: R24.1 U2.11
NET_U2_12: R25.1 U2.12
NET_U2_13: R26.1 U2.13
NET_U2_14: R27.1 U2.14
NET_U2_16: R21.1 U2.16
NET_U2_18: R29.1 U2.18
NET_U2_20: U2.20
NET_U2_23: R22.1 U2.23
NET_U2_27: C32.1 C33.1 C34.1 U2.22 U2.27 U2.28
NET_U2_37: R28.1 U2.37
NET_U2_38: R19.1 U2.38
NET_U2_39: R20.1 U2.39
NET_U3_1: U2.31 U3.1
NET_U3_2: F2.2 U3.2
NET_U3_3: U2.30 U3.3
NET_U3_4: U2.26 U3.4
NET_U3_5: C31.1 F2.1 U3.2 U3.5
NET_U3_6: U2.25 U3.6
NET_U3_8: R16.1 U3.8
NET_U3_9: R17.1 U3.9
NET_U3_11: R18.1 U3.11
NET_U3_12: R17.2 U3.12
NET_U3_13: R15.1 U3.13 U3.14
NET_U3_35: R18.2
NET_U4_14: R31.1 U4.14
NET_U4_17: C45.1 U4.17
NET_U4_19: R32.1 U4.19
NET_U5_1: R30.1 U5.1
NET_U5_2: U4.16 U5.2
NET_U5_3: U4.15 U5.3
NET_U5_19: R30.2
NET_U6_4: R4.1 U6.4 U29.4
NET_U6_5: R11.1
NET_U6_20: R33.1 U6.20
NET_U8_10: C63.1 U8.10
NET_U8_29: R34.1 U8.29
NET_U8_31: R35.1 U8.31
NET_U9_1: U8.4 U9.1
NET_U9_2: U8.2 U9.2
NET_U9_5: U8.6 U9.5
NET_U10_2: C54.1 U10.2
NET_U10_5: C53.1 U10.5
NET_U10_11: C54.2
NET_U10_12: C53.2
NET_U11_2: C56.1 C57.1 U11.2
NET_U11_5: C55.1 U11.5
NET_U11_13: C56.2 C57.2
NET_U11_14: C55.2
NET_U12_1: C58.1 C59.1 C64.1 U8.16 U12.1
NET_U12_15: C58.2 C59.2
NET_U13_9: U13.9
NET_U13_20: C73.1 C78.1 U13.20
NET_U14_2: C66.1 R37.1 U14.2
NET_U14_5: C65.1 R36.1 U14.5
NET_U14_13: C65.2
NET_U14_14: C66.2
NET_U15_5: C67.1 C68.1 R38.1 R39.1 U15.5
NET_U15_21: R39.2
NET_U15_22: C67.2
NET_U22_4: R40.2 R41.1 U22.4
NET_U23_1: U23.1
NET_U23_3: I1.1 U23.3
NET_U23_5: R42.1 R43.1 U23.5
NET_U23_ATNET_3: I1.2 R43.2
NET_U24_3: C90.2 I2.1 U24.3 U24.4
NET_U24_6: C90.1 U24.6
NET_U24_7: C89.1 U24.7 U24.12
NET_U24_10: R46.1 U24.10
NET_U24_11: R44.1 R45.1 U24.11
NET_U24_14: U24.14
NET_U24_ATNET_3: I2.2 R45.2
NET_U25_1: I3.1 U25.1
NET_U25_5: R47.1 U25.5
NET_U25_6: R48.1 U25.6
NET_U25_8: C94.1 U25.8
NET_U26_1: R50.1 R51.1 U26.1
NET_U26_3: R52.2 R53.1 U26.3
NET_U26_4: R49.1 U26.4 U29.2 U30.2 U31.2
NET_U27_1: R2.1 U27.1 U27.2
PROC_DSIHOST_CKN: U1.124 U6.13
PROC_DSIHOST_CKP: U1.123 U6.14
PROC_DSIHOST_D0N: U1.121 U6.7
PROC_DSIHOST_D0P: U1.120 U6.8
PROC_DSIHOST_D1N: U1.127 U6.10
PROC_DSIHOST_D1P: U1.126 U6.11
PROC_ETH_COL: U1.47 U2.61
PROC_ETH_CRS: U1.43 U2.62
PROC_ETH_RX_CLK: U1.44 U2.50
PROC_ETH_RX_DV: U1.56 U2.49
PROC_ETH_RX_ER: U1.12 U2.51
PROC_ETH_RXD0: U1.57 U2.48
PROC_ETH_RXD1: U1.58 U2.47
PROC_ETH_RXD2: U1.61 U2.44
PROC_ETH_RXD3: U1.62 U2.43
PROC_ETH_TX_CLK: U1.38 U2.53
PROC_ETH_TX_EN: U1.91 U2.56
PROC_ETH_TXD0: U1.104 U2.57
PROC_ETH_TXD1: U1.105 U2.58
PROC_ETH_TXD2: U1.37 U2.59
PROC_ETH_TXD3: U1.1 U2.60
PROC_I2S2_CK: U1.90 U8.24
PROC_I2S2_EXT_SD: U1.106 U8.25
PROC_I2S2_SD: U1.107 U8.26
PROC_I2S2_WS: U1.154 U8.23
PROC_I2S3_CK: U1.192 U13.7
PROC_I2S3_EXT_SD: U1.193 U13.10
PROC_I2S3_SD: U1.163 U13.8
PROC_I2S3_WS: U1.53 U13.9 U13.11
PROC_UART4_RX: U1.162 U4.1
PROC_UART4_TX: U1.161 U4.5
VCC_S1_4V6: C82.1 C83.1 C86.1 C88.1 C92.1 C96.1 C97.1 I3.2 J1.1 R47.2 U22.5 U22.8 U23.4 U24.15 U24.16 U25.3 U25.4
VCC_TIER1_1V5: C60.1 C84.1 C85.1 R40.1 U6.29 U8.30 U22.1
VCC_TIER1_2V8: C49.1 C50.1 C51.1 C87.2 I1.2 R43.2 U6.16 U6.21 U6.22 U6.23
VCC_TIER1_3V3: C1.1 C2.1 C3.1 C4.1 C5.1 C6.1 C7.1 C8.1 C9.1 C10.1 C11.1 C12.1 C13.1 C14.1 C15.1 C16.1 C17.1 C18.1 C19.1 C20.1 C25.1 C38.1 C39.1 C40.1 C41.1 C42.1 C43.1 C44.1 C46.1 C47.1 C52.1 C61.1 C62.1 C69.1 C70.1 C71.1 C72.1 C74.1 C75.1 C76.1 C77.1 C81.1 C91.2 C95.1 C98.1 C99.1 C100.1 F1.2 I2.2 R4.2 R5.2 R6.2 R7.2 R8.2 R9.2 R10.2 R11.2 R12.2 R13.2 R20.2 R24.2 R29.2 R31.2 R34.2 R45.2 R49.2 R50.2 R52.1 U1.6 U1.15 U1.26 U1.39 U1.52 U1.59 U1.73 U1.83 U1.94 U1.103 U1.115 U1.118 U1.137 U1.150 U1.158 U1.171 U1.185 U1.204 U2.1 U2.3 U2.46 U4.4 U4.20 U6.2 U7.8 U8.5 U8.20 U13.3 U13.5 U13.12 U13.18 U21.4 U24.8 U26.6 U29.5 U30.5 U31.5
VCC_TIER1_12V0: C48.1 C93.1 R48.2 U6.30 U25.7

## Tracks (layer width: path | path; a pad name or v marks a point on that pad's centre or on a via)
CLK_CRYSTAL_U1_9  (2 unrouted)
CLK_CRYSTAL_U1_10  (2 unrouted)
CLK_CRYSTAL_U1_32  (2 unrouted)
CLK_CRYSTAL_U1_33  (2 unrouted)
CLK_CRYSTAL_U2_5  (1 unrouted)
CLK_CRYSTAL_U2_6  (1 unrouted)
CLK_CRYSTAL_U4_27  (1 unrouted)
CLK_CRYSTAL_U4_28  (1 unrouted)
CLK_CRYSTAL_U13_1  (2 unrouted)
CLK_CRYSTAL_U13_2  (2 unrouted)
CLK_U8_21  (1 unrouted)
GND  (195 unrouted)
NET_U1_34  (2 unrouted)
NET_U1_36  (2 unrouted)
NET_U1_42  (4 unrouted)
NET_U1_45  (2 unrouted)
NET_U1_63  (1 unrouted)
NET_U1_92  (1 unrouted)
NET_U1_125  (2 unrouted)
NET_U1_148  (1 unrouted)
NET_U1_195  (2 unrouted)
NET_U1_196  (2 unrouted)
NET_U1_197  (1 unrouted)
NET_U1_203  (1 unrouted)
NET_U1_208  (1 unrouted)
NET_U2_2  (4 unrouted)
NET_U2_9  (2 unrouted)
NET_U2_10  (1 unrouted)
NET_U2_11  (1 unrouted)
NET_U2_12  (1 unrouted)
NET_U2_13  (1 unrouted)
NET_U2_14  (1 unrouted)
NET_U2_16  (1 unrouted)
NET_U2_18  (1 unrouted)
NET_U2_23  (1 unrouted)
NET_U2_27  (5 unrouted)
NET_U2_37  (1 unrouted)
NET_U2_38  (1 unrouted)
NET_U2_39  (1 unrouted)
NET_U3_1  (1 unrouted)
NET_U3_2  (1 unrouted)
NET_U3_3  (1 unrouted)
NET_U3_4  (1 unrouted)
NET_U3_5  (3 unrouted)
NET_U3_6  (1 unrouted)
NET_U3_8  (1 unrouted)
NET_U3_9  (1 unrouted)
NET_U3_11  (1 unrouted)
NET_U3_12  (1 unrouted)
NET_U3_13  (2 unrouted)
NET_U4_14  (1 unrouted)
NET_U4_17  (1 unrouted)
NET_U4_19  (1 unrouted)
NET_U5_1  (1 unrouted)
NET_U5_2  (1 unrouted)
NET_U5_3  (1 unrouted)
NET_U6_4  (2 unrouted)
NET_U6_20  (1 unrouted)
NET_U8_10  (1 unrouted)
NET_U8_29  (1 unrouted)
NET_U8_31  (1 unrouted)
NET_U9_1  (1 unrouted)
NET_U9_2  (1 unrouted)
NET_U9_5  (1 unrouted)
NET_U10_2  (1 unrouted)
NET_U10_5  (1 unrouted)
NET_U11_2  (2 unrouted)
NET_U11_5  (1 unrouted)
NET_U11_13  (1 unrouted)
NET_U12_1  (4 unrouted)
NET_U12_15  (1 unrouted)
NET_U13_20  (2 unrouted)
NET_U14_2  (2 unrouted)
NET_U14_5  (2 unrouted)
NET_U15_5  (4 unrouted)
NET_U22_4  (2 unrouted)
NET_U23_3  (1 unrouted)
NET_U23_5  (2 unrouted)
NET_U23_ATNET_3  (1 unrouted)
NET_U24_3  (3 unrouted)
NET_U24_6  (1 unrouted)
NET_U24_7  (2 unrouted)
NET_U24_10  (1 unrouted)
NET_U24_11  (2 unrouted)
NET_U24_ATNET_3  (1 unrouted)
NET_U25_1  (1 unrouted)
NET_U25_5  (1 unrouted)
NET_U25_6  (1 unrouted)
NET_U25_8  (1 unrouted)
NET_U26_1  (2 unrouted)
NET_U26_3  (2 unrouted)
NET_U26_4  (4 unrouted)
NET_U27_1  (2 unrouted)
PROC_DSIHOST_CKN  (1 unrouted)
PROC_DSIHOST_CKP  (1 unrouted)
PROC_DSIHOST_D0N  (1 unrouted)
PROC_DSIHOST_D0P  (1 unrouted)
PROC_DSIHOST_D1N  (1 unrouted)
PROC_DSIHOST_D1P  (1 unrouted)
PROC_ETH_COL  (1 unrouted)
PROC_ETH_CRS  (1 unrouted)
PROC_ETH_RX_CLK  (1 unrouted)
PROC_ETH_RX_DV  (1 unrouted)
PROC_ETH_RX_ER  (1 unrouted)
PROC_ETH_RXD0  (1 unrouted)
PROC_ETH_RXD1  (1 unrouted)
PROC_ETH_RXD2  (1 unrouted)
PROC_ETH_RXD3  (1 unrouted)
PROC_ETH_TX_CLK  (1 unrouted)
PROC_ETH_TX_EN  (1 unrouted)
PROC_ETH_TXD0  (1 unrouted)
PROC_ETH_TXD1  (1 unrouted)
PROC_ETH_TXD2  (1 unrouted)
PROC_ETH_TXD3  (1 unrouted)
PROC_I2S2_CK  (1 unrouted)
PROC_I2S2_EXT_SD  (1 unrouted)
PROC_I2S2_SD  (1 unrouted)
PROC_I2S2_WS  (1 unrouted)
PROC_I2S3_CK  (1 unrouted)
PROC_I2S3_EXT_SD  (1 unrouted)
PROC_I2S3_SD  (1 unrouted)
PROC_I2S3_WS  (2 unrouted)
PROC_UART4_RX  (1 unrouted)
PROC_UART4_TX  (1 unrouted)
VCC_S1_4V6  (16 unrouted)
VCC_TIER1_1V5  (6 unrouted)
VCC_TIER1_2V8  (9 unrouted)
VCC_TIER1_3V3  (104 unrouted)
VCC_TIER1_12V0  (4 unrouted)